# Altium PCB PCB1.PcbDoc
Units mm, origin at the board's own origin, x right, y up, seen from the top; angles counter-clockwise.
Board outline 97.28 x 101.47 mm, 2 copper layers (Top Layer, Bottom Layer); 96 components, 19 nets, 263 pads, 0 vias.
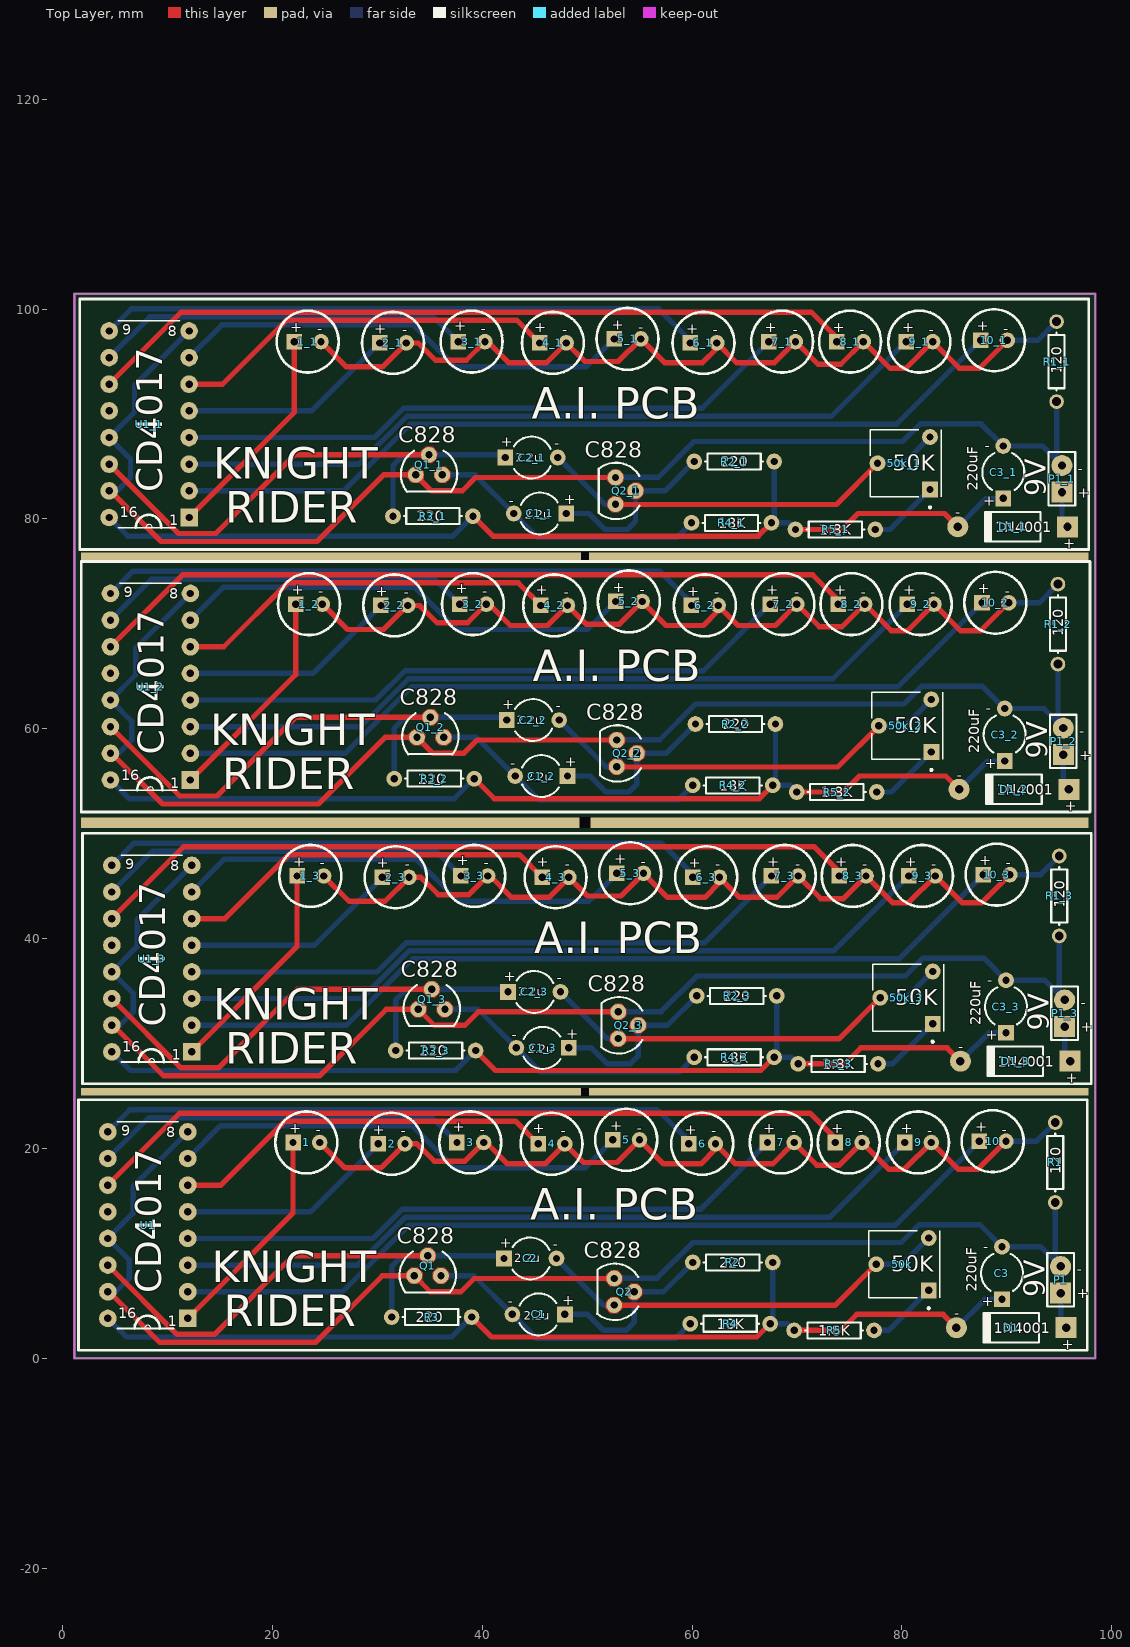
[diagram p0: Top Layer view]
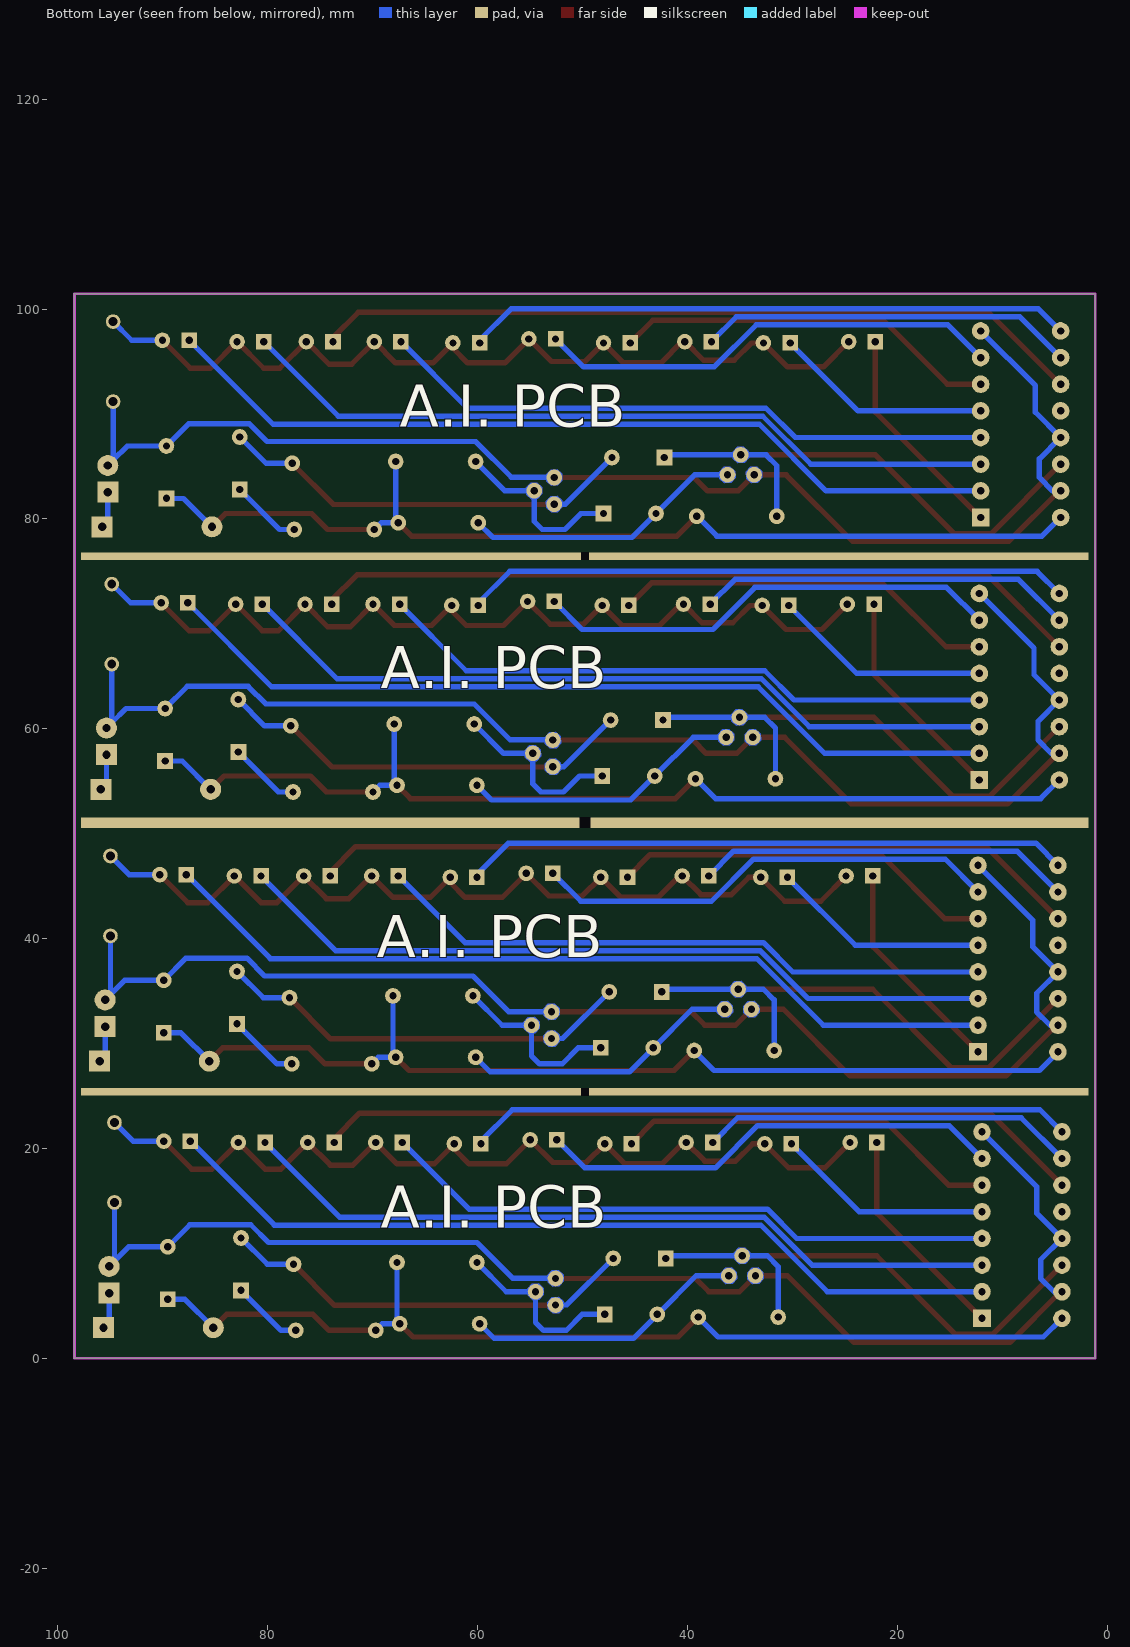
[diagram p1: Bottom Layer view, seen from below]

## Layer stack, top to bottom
Top Solder: solder mask 0.0102, Solder Resist, Dk 3.5
Top Layer: signal copper 0.0356
Dielectric 1: dielectric 0.32, FR-4, Dk 4.8
Bottom Layer: signal copper 0.0356
Bottom Solder: solder mask 0.0102, Solder Resist, Dk 3.5

## Board outline
1.143,0 1.143,101.473 98.425,101.473 98.425,0

## Design rules (kind name [scope] priority, off if disabled: settings)
Clearance [All] p1: gap=0.254 ignorepadtopadclearanceinfootprint=FALSE except(0: Arc-Hole Track-Hole SMDPad-Hole THPad-Hole Via-Hole Fill-Hole Poly-Hole Region-Hole Text-Hole)
PolygonConnect [All] p1: connectstyle=Relief reliefconductorwidth=0.254 reliefentries=4 polygonreliefangle="90 Angle" airgapwidth=0.254
RoutingVias [All] p1: holewidth=0.711 width=1.27 viastyle="Through Hole" minholewidth=0.711 minwidth=1.27 maxholewidth=0.711 maxwidth=1.27
SolderMaskExpansion [All] p1: expansion=0.102
Width [All] p1: maxlimit=0.508 minlimit=0.254 preferedwidth=0.508
30 further rules are at their usual default settings.

## Classes and differential pairs
component class Sheet1: 1 2 3 4 5 6 7 8 9 10 50k C1 C2 C3 D1 P1 Q1 Q2 Q? R1 R2 R3 R4 R5 U1

## Components (designator, comment, footprint, x,y, rotation, side; value= is the part's Value field where it differs from the comment)
1 "L-53GD" L-53GD 23.241,20.574 r0 top
1_1 "L-53GD" L-53GD 23.368,96.901 r0 top (schematic designator 1)
1_2 "L-53GD" L-53GD 23.495,71.882 r0 top (schematic designator 1)
1_3 "L-53GD" L-53GD 23.622,45.974 r0 top (schematic designator 1)
2 "L-53GD" L-53GD 31.369,20.447 r0 top
2_1 "L-53GD" L-53GD 31.496,96.774 r0 top (schematic designator 2)
2_2 "L-53GD" L-53GD 31.623,71.755 r0 top (schematic designator 2)
2_3 "L-53GD" L-53GD 31.75,45.847 r0 top (schematic designator 2)
3 "L-53GD" L-53GD 38.862,20.574 r0 top
3_1 "L-53GD" L-53GD 38.989,96.901 r0 top (schematic designator 3)
3_2 "L-53GD" L-53GD 39.116,71.882 r0 top (schematic designator 3)
3_3 "L-53GD" L-53GD 39.243,45.974 r0 top (schematic designator 3)
4 "L-53GD" L-53GD 46.609,20.447 r0 top
4_1 "L-53GD" L-53GD 46.736,96.774 r0 top (schematic designator 4)
4_2 "L-53GD" L-53GD 46.863,71.755 r0 top (schematic designator 4)
4_3 "L-53GD" L-53GD 46.99,45.847 r0 top (schematic designator 4)
5 "L-53GD" L-53GD 53.721,20.828 r0 top
5_1 "L-53GD" L-53GD 53.848,97.155 r0 top (schematic designator 5)
5_2 "L-53GD" L-53GD 53.975,72.136 r0 top (schematic designator 5)
5_3 "L-53GD" L-53GD 54.102,46.228 r0 top (schematic designator 5)
6 "L-53GD" L-53GD 60.96,20.447 r0 top
6_1 "L-53GD" L-53GD 61.087,96.774 r0 top (schematic designator 6)
6_2 "L-53GD" L-53GD 61.214,71.755 r0 top (schematic designator 6)
6_3 "L-53GD" L-53GD 61.341,45.847 r0 top (schematic designator 6)
7 "L-53GD" L-53GD 68.453,20.574 r0 top
7_1 "L-53GD" L-53GD 68.58,96.901 r0 top (schematic designator 7)
7_2 "L-53GD" L-53GD 68.707,71.882 r0 top (schematic designator 7)
7_3 "L-53GD" L-53GD 68.834,45.974 r0 top (schematic designator 7)
8 "L-53GD" L-53GD 74.93,20.574 r0 top
8_1 "L-53GD" L-53GD 75.057,96.901 r0 top (schematic designator 8)
8_2 "L-53GD" L-53GD 75.184,71.882 r0 top (schematic designator 8)
8_3 "L-53GD" L-53GD 75.311,45.974 r0 top (schematic designator 8)
9 "L-53GD" L-53GD 81.534,20.574 r0 top
9_1 "L-53GD" L-53GD 81.661,96.901 r0 top (schematic designator 9)
9_2 "L-53GD" L-53GD 81.788,71.882 r0 top (schematic designator 9)
9_3 "L-53GD" L-53GD 81.915,45.974 r0 top (schematic designator 9)
10 "L-53GD" L-53GD 88.646,20.701 r0 top
10_1 "L-53GD" L-53GD 88.773,97.028 r0 top (schematic designator 10)
10_2 "L-53GD" L-53GD 88.9,72.009 r0 top (schematic designator 10)
10_3 "L-53GD" L-53GD 89.027,46.101 r0 top (schematic designator 10)
50k "50K" *TRIM_EVN-D8AA03B14 80.05,8.977 r90 top
50k_1 "50K" *TRIM_EVN-D8AA03B14 80.177,85.304 r90 top (schematic designator 50k)
50k_2 "50K" *TRIM_EVN-D8AA03B14 80.304,60.285 r90 top (schematic designator 50k)
50k_3 "50K" *TRIM_EVN-D8AA03B14 80.431,34.377 r90 top (schematic designator 50k)
C1 "" CAPR5-4X5 45.379,4.191 r180 top value=2.2uF
C1_1 "" CAPR5-4X5 45.506,80.518 r180 top value=2.2uF (schematic designator C1)
C1_2 "" CAPR5-4X5 45.633,55.499 r180 top value=2.2uF (schematic designator C1)
C1_3 "" CAPR5-4X5 45.76,29.591 r180 top value=2.2uF (schematic designator C1)
C2 "" CAPR5-4X5 44.577,9.525 r0 top value=2.2uF
C2_1 "" CAPR5-4X5 44.704,85.852 r0 top value=2.2uF (schematic designator C2)
C2_2 "" CAPR5-4X5 44.831,60.833 r0 top value=2.2uF (schematic designator C2)
C2_3 "" CAPR5-4X5 44.958,34.925 r0 top value=2.2uF (schematic designator C2)
C3 "" CAPR5-4X5 89.535,8.128 r90 top value=100pF
C3_1 "" CAPR5-4X5 89.662,84.455 r90 top value=100pF (schematic designator C3)
C3_2 "" CAPR5-4X5 89.789,59.436 r90 top value=100pF (schematic designator C3)
C3_3 "" CAPR5-4X5 89.916,33.528 r90 top value=100pF (schematic designator C3)
D1 "" DO-41 90.424,2.921 r180 top
D1_1 "" DO-41 90.551,79.248 r180 top (schematic designator D1)
D1_2 "" DO-41 90.678,54.229 r180 top (schematic designator D1)
D1_3 "" DO-41 90.805,28.321 r180 top (schematic designator D1)
P1 "" HDR1X2 95.123,6.223 r90 top
P1_1 "" HDR1X2 95.25,82.55 r90 top (schematic designator P1)
P1_2 "" HDR1X2 95.377,57.531 r90 top (schematic designator P1)
P1_3 "" HDR1X2 95.504,31.623 r90 top (schematic designator P1)
Q1 "P2N2222A" *TO92 34.798,7.874 r0 top
Q1_1 "P2N2222A" *TO92 34.925,84.201 r0 top (schematic designator Q1)
Q1_2 "P2N2222A" *TO92 35.052,59.182 r0 top (schematic designator Q1)
Q1_3 "P2N2222A" *TO92 35.179,33.274 r0 top (schematic designator Q1)
Q2 "P2N2222A" *TO92 52.578,6.35 r270 top
Q2_1 "P2N2222A" *TO92 52.705,82.677 r270 top (schematic designator Q2)
Q2_2 "P2N2222A" *TO92 52.832,57.658 r270 top (schematic designator Q2)
Q2_3 "P2N2222A" *TO92 52.959,31.75 r270 top (schematic designator Q2)
R1 "" AXIAL-0.3#1 94.615,18.669 r270 top value=220
R1_1 "" AXIAL-0.3#1 94.742,94.996 r270 top value=220 (schematic designator R1)
R1_2 "" AXIAL-0.3#1 94.869,69.977 r270 top value=220 (schematic designator R1)
R1_3 "" AXIAL-0.3#1 94.996,44.069 r270 top value=220 (schematic designator R1)
R2 "" AXIAL-0.3#2 63.881,9.144 r0 top value=220
R2_1 "" AXIAL-0.3#2 64.008,85.471 r0 top value=220 (schematic designator R2)
R2_2 "" AXIAL-0.3#2 64.135,60.452 r0 top value=220 (schematic designator R2)
R2_3 "" AXIAL-0.3#2 64.262,34.544 r0 top value=220 (schematic designator R2)
R3 "" AXIAL-0.3#2 35.179,3.937 r180 top value=220
R3_1 "" AXIAL-0.3#2 35.306,80.264 r180 top value=220 (schematic designator R3)
R3_2 "" AXIAL-0.3#2 35.433,55.245 r180 top value=220 (schematic designator R3)
R3_3 "" AXIAL-0.3#2 35.56,29.337 r180 top value=220 (schematic designator R3)
R4 "" AXIAL-0.3#2 63.627,3.302 r0 top value=18K
R4_1 "" AXIAL-0.3#2 63.754,79.629 r0 top value=18K (schematic designator R4)
R4_2 "" AXIAL-0.3#2 63.881,54.61 r0 top value=18K (schematic designator R4)
R4_3 "" AXIAL-0.3#2 64.008,28.702 r0 top value=18K (schematic designator R4)
R5 "" AXIAL-0.3#2 73.533,2.667 r180 top value=1.8K
R5_1 "" AXIAL-0.3#2 73.66,78.994 r180 top value=1.8K (schematic designator R5)
R5_2 "" AXIAL-0.3#2 73.787,53.975 r180 top value=1.8K (schematic designator R5)
R5_3 "" AXIAL-0.3#2 73.914,28.067 r180 top value=1.8K (schematic designator R5)
U1 "CD4017BE" *DIP254P762X508-16 4.318,21.59 r180 top
U1_1 "CD4017BE" *DIP254P762X508-16 4.445,97.917 r180 top (schematic designator U1)
U1_2 "CD4017BE" *DIP254P762X508-16 4.572,72.898 r180 top (schematic designator U1)
U1_3 "CD4017BE" *DIP254P762X508-16 4.699,46.99 r180 top (schematic designator U1)

## Footprints (in the part's own frame and the unit in brackets; to place one, negate y for a bottom-side part, rotate by r counter-clockwise, add the part's x,y. Pads: shape width x height; smd on the part's side, far side on the other; paste and mask are expansions set on the pad)
*DIP254P762X508-16 [mil]
  rect 66x66 hole 27.56: 1(-300,700)
  round 66 hole 27.56: 2(-300,600) 3(-300,500) 4(-300,400) 5(-300,300) 6(-300,200) 7(-300,100) 8(-300,0) 9(0,0) 10(0,100) 11(0,200) 12(0,300) 13(0,400) 14(0,500) 15(0,600) 16(0,700)
  silkscreen extent -265,-38 -35,738
*TO92 [mm]
  round 1.5 hole 0.7: 1(1.27,0) 2(0,1.905) 3(-1.27,0)
  Top Layer region: -0.482,0.287 -0.916,0.76 -1.557,0.788 -2.03,0.354 -2.058,-0.287 -1.624,-0.76 -0.983,-0.788 -0.51,-0.354
  Top Layer region: 0.788,2.192 0.354,2.665 -0.287,2.693 -0.76,2.259 -0.788,1.618 -0.354,1.145 0.287,1.117 0.76,1.551
  Top Layer region: 2.058,0.287 1.624,0.76 0.983,0.788 0.51,0.354 0.482,-0.287 0.916,-0.76 1.557,-0.788 2.03,-0.354
  Bottom Layer region: -0.482,0.287 -0.916,0.76 -1.557,0.788 -2.03,0.354 -2.058,-0.287 -1.624,-0.76 -0.983,-0.788 -0.51,-0.354
  Bottom Layer region: 0.788,2.192 0.354,2.665 -0.287,2.693 -0.76,2.259 -0.788,1.618 -0.354,1.145 0.287,1.117 0.76,1.551
  Bottom Layer region: 2.058,0.287 1.624,0.76 0.983,0.788 0.51,0.354 0.482,-0.287 0.916,-0.76 1.557,-0.788 2.03,-0.354
  Multi-Layer region: -0.482,0.287 -0.916,0.76 -1.557,0.788 -2.03,0.354 -2.058,-0.287 -1.624,-0.76 -0.983,-0.788 -0.51,-0.354
  Multi-Layer region: 0.788,2.192 0.354,2.665 -0.287,2.693 -0.76,2.259 -0.788,1.618 -0.354,1.145 0.287,1.117 0.76,1.551
  Multi-Layer region: 2.058,0.287 1.624,0.76 0.983,0.788 0.51,0.354 0.482,-0.287 0.916,-0.76 1.557,-0.788 2.03,-0.354
  silkscreen extent -2.68,-1.61 2.7,2.3
*TRIM_EVN-D8AA03B14 [mm]
  rect 1.508x1.508 hole 0.7: 1(-2.5,-2.5)
  round 1.508 hole 0.7: 2(0,2.5) 3(2.5,-2.5)
  silkscreen extent -4.3,-3.57 3.2,3.2
AXIAL-0.3#1 [mm] "Axial Device, Thru-Hole; 2 Leads; 0.3 in Pin Spacing"
  round 1.4 hole 0.85: 1(-3.81,0) 2(3.81,0)
  silkscreen extent -2.77,-0.76 2.77,0.76
AXIAL-0.3#2 [mm] "Axial Device, Thru-Hole; 2 Leads; 0.3 in Pin Spacing"
  round 1.5 hole 0.7: 1(-3.81,0) 2(3.81,0)
  silkscreen extent -2.77,-0.76 2.77,0.76
CAPR5-4X5 [mm] "Capacitor; 2 Leads"
  rect 1.5x1.5 hole 0.7: 1(-2.5,0)
  round 1.5 hole 0.7: 2(2.5,0)
  silkscreen extent -1.69,-2 1.82,2
DO-41 [mm] "Diode, Axial; Body 5.2 x 2.7 mm (LxDia. max), Lead Dia. 0.86 mm (max)"
  rect 2x2 hole 0.8: 1(-5.23,0)
  round 2 hole 0.8: 2(5.23,0)
  silkscreen extent -2.65,-1.4 2.75,1.4
HDR1X2 [mm] "Connector; Header; 2 Position"
  rect 2x2 hole 0.8: 1(0,0)
  round 2 hole 0.8: 2(2.54,0)
  silkscreen extent -1.27,-1.27 3.81,1.27
L-53GD [mm]
  rect 1.48x1.48 hole 0.7: 1(-1.27,0)
  round 1.48 hole 0.7: 2(1.27,0)
  silkscreen extent -2.95,-2.95 2.95,2.95

## Part data
1 1_1 1_2 1_3 2 2_1 2_2 2_3 3 3_1 3_2 3_3 4 4_1 4_2 4_3 5 5_1 5_2 5_3 6 6_1 6_2 6_3 7 7_1 7_2 7_3 8 8_1 8_2 8_3 9 9_1 9_2 9_3 10 10_1 10_2 10_3: "LED", Manufacturer_Name=Kingbright, Mouser Part Number=N/A, RS Part Number=2286004A, Allied_Number=70424261, Allied Price/Stock=http://www.alliedelec.com/kingbright-l-53gd/70424261/, Datasheet Link=http://docs-emea.rs-online.com/webdocs/151e/0900766b8151e408.pdf, Manufacturer_Part_Number=L-53GD, Mouser Price/Stock=https://www.mouser.com/Search/Refine.aspx?Keyword=N%2FA, RS Price/Stock=http://uk.rs-online.com/web/p/products/2286004A
50k 50k_1 50k_2 50k_3: library part EVN-D8AA03B14, "Trimmer; Carbon; Rest 10 Kilohms; PCB; 1 Turn; Pwr-Rtg 0.1 W; Linear; Top Adj; 6 mm SQ", Package="PQFP-44 Panasonic", Availability=Unavailable, MF="Panasonic Electronic", MP=EVN-D8AA03B14, Price=None, SnapEDA_Link=https://www.snapeda.com/parts/EVN-D8AA03B14/Panasonic%20Electronic%20Components/view-part/?ref=snap
C1 C1_1 C1_2 C1_3 C2 C2_1 C2_2 C2_3 C3 C3_1 C3_2 C3_3: library part Cap2, "Capacitor", PackageDescription="Capacitor; 2 Leads", PackageReference=CAPR5-4X5, Published=23-Sep-2002, Publisher="Altium Limited"
D1 D1_1 D1_2 D1_3: library part "Diode 1N4001", "1 Amp General Purpose Rectifier", Code_JEDEC=DO-204-AL, ComponentLink1Description="Manufacturer Link", ComponentLink1URL=http://www.fairchildsemi.com/, ComponentLink2Description=Datasheet, ComponentLink2URL=http://www.fairchildsemi.com/ds/1N%2F1N4001.pdf, DatasheetVersion=1998, LatestRevisionDate=17-Jul-2002, LatestRevisionNote="Re-released for DXP Platform.", PackageDescription="Diode, Axial; Body 5.2 x 2.7 mm (LxDia. max), Lead Dia. 0.86 mm (max)", PackageReference=DO-41, PackageVersion=Aug-1999, Published=8-Jun-2000, Publisher="Altium Limited"
P1 P1_1 P1_2 P1_3: library part "Header 2", "Header, 2-Pin", LatestRevisionDate=17-Jul-2002, LatestRevisionNote="Re-released for DXP Platform.", Publisher="Altium Limited"
Q1 Q1_1 Q1_2 Q1_3 Q2 Q2_1 Q2_2 Q2_3: Package="TO-92 NXP Semiconductors", Availability=Unavailable, MF="ON Semiconductor", MP=P2N2222A, Price=None, SnapEDA_Link=https://www.snapeda.com/parts/P2N2222A/ON%20Semiconductor/view-part/?ref=snap
R1 R1_1 R1_2 R1_3 R2 R2_1 R2_2 R2_3 R3 R3_1 R3_2 R3_3 R4 R4_1 R4_2 R4_3 R5 R5_1 R5_2 R5_3: library part Res1, "Resistor", LatestRevisionDate=17-Jul-2002, LatestRevisionNote="Re-released for DXP Platform.", PackageDescription="Axial Device, Thru-Hole; 2 Leads; 0.3 in Pin Spacing", PackageReference=AXIAL-0.3, Published=8-Jun-2000, Publisher="Altium Limited"
U1 U1_1 U1_2 U1_3: "IC Mos 4017/CD4017BE HARRIS", Package="DIP-16 Intersil", Availability=Unavailable, MF=Texas, MP=CD4017BE, Price=None, SnapEDA_Link=https://www.snapeda.com/parts/CD4017BE/Texas%20Instruments/view-part/?ref=snap

## Free pads (board coordinates)
  rect 96x0.7 hole 0.7 square: 34(49.784,25.4) 34(49.784,76.454)
  rect 96x1 hole 1 square: 34(49.784,51.054)

## Nets (pads, with @x,y where several pads share a name; then routed paths per layer and width w, separated by ;. In a path a pad name is that pad's centre, name@x,y a point inside that pad or via, vN(x,y) a via of type N, cw(c..) or ccw(c..) an arc to the next point about the centre after c; other vN are vias at no path point)
Net1_1: 1.1 U1.1 | length 20.9
  Top Layer w0.508: U1.1 21.971,13.843 1.1
Net1_2: 1.2 2.2 3.2 4.2 5.2 6.2 7.2 8.2 9.2 10.2 R1.1 | length 87.2
  Top Layer w0.508: 1.2 26.924,18.161 30.353,18.161 2.2 33.782,20.447 35.433,18.796 38.354,18.796 3.2 40.386,20.574 42.418,18.542 45.974,18.542 4.2 49.657,18.669 52.832,18.669 5.2 57.277,18.542 60.833,18.542 62.23,19.939 6.2 64.135,18.542 67.691,18.542 7.2 71.882,18.415 74.041,18.415 8.2 78.74,18.034 80.264,18.034 9.2 85.344,18.034 87.249,18.034 10.2
  Bottom Layer w0.508: 10.2 92.837,20.701 R1.1
Net2_1: 2.1 U1.5 | length 20.8
  Bottom Layer w0.508: U1.5 23.622,13.97 2.1
Net3_1: 3.1 U1.10 | length 35.9
  Bottom Layer w0.508: U1.10 8.204,22.936 35.23,22.936 3.1
Net4_1: 4.1 U1.6 | length 36.8
  Top Layer w0.508: U1.6 15.113,16.51 21.209,22.606 43.18,22.606 4.1
Net5_1: 5.1 U1.7 | length 44.6
  Bottom Layer w0.508: U1.7 15.062,22.174 33.325,22.174 37.338,18.161 49.784,18.161 5.1
Net6_1: 6.1 U1.9 | length 57.7
  Bottom Layer w0.508: U1.9 6.426,23.698 56.693,23.698 59.69,20.701 6.1
Net7_1: 7.1 U1.4 | length 59
  Bottom Layer w0.508: U1.4 29.595,11.43 32.389,14.224 60.833,14.224 7.1
Net8_1: 8.1 U1.11 | length 73.6
  Top Layer w0.508: U1.11 11.176,23.368 71.247,23.368 73.66,20.955 8.1
Net9_1: 9.1 U1.3 | length 73.2
  Bottom Layer w0.508: U1.3 28.132,8.89 32.704,13.462 73.152,13.462 9.1
Net10_1: 10.1 U1.2 | length 81.4
  Bottom Layer w0.508: U1.2 26.67,6.35 33.02,12.7 79.375,12.7 10.1
Net50k_1: 50k.1 R5.1 | length 6.8
  Bottom Layer w0.508: R5.1 78.74,2.667 50k.1
Net50k_2: 50k.2 50k.3 C2.2 Q2.1 | length 40
  Top Layer w0.508: Q2.1 52.578,5.054 73.627,5.054 50k.2
  Bottom Layer w0.508: C2.2 51.522,5.08 Q2.1 ; 50k.2 80.05,8.977 50k.3
NetC1_1: C1.1 Q2.2 R2.1 | length 17.2
  Bottom Layer w0.508: C1.1 50.038,4.191 51.562,2.667 53.721,2.667 54.483,3.429 Q2.2 57.277,6.35 R2.1
NetC1_2: C1.2 Q1.1 R4.1 | length 26.8
  Bottom Layer w0.508: Q1.1 39.196,7.874 C1.2 45.165,1.905 58.42,1.905 R4.1
NetC2_1: C2.1 Q1.2 R3.2 U1.14 | length 52.4
  Top Layer w0.508: U1.14 10.922,2.286 14.478,2.286 21.971,9.779 Q1.2
  Bottom Layer w0.508: R3.2 31.369,8.763 32.385,9.779 Q1.2 41.823,9.779 C2.1
NetC3_1: C3.1 D1.2 R2.2 R3.1 R4.2 R5.2 U1.16 | length 96.5
  Top Layer w0.508: R3.1 40.894,2.032 66.167,2.032 R4.2 ; R5.2 74.168,2.667 75.692,4.191 83.924,4.191 D1.2
  Bottom Layer w0.508: U1.16 6.096,2.032 37.084,2.032 R3.1 ; R2.2 67.691,3.556 R4.2 69.088,3.302 R5.2 ; D1.2 87.901,5.628 C3.1
NetC3_2: C3.2 P1.2 Q1.3 Q2.3 R1.2 U1.8 U1.13 U1.15 | length 126.5
  Top Layer w0.508: U1.15 4.445,6.35 9.271,1.524 24.13,1.524 30.48,7.874 Q1.3 35.052,6.35 37.973,6.35 39.243,7.62 Q2.3
  Bottom Layer w0.508: U1.15 5.08,6.35 6.35,7.62 6.35,9.398 U1.13 6.731,13.843 6.731,16.383 U1.8 ; Q2.3 52.578,7.646 56.668,7.646 60.071,11.049 79.932,11.049 81.622,12.739 87.424,12.739 C3.2 93.258,10.628 P1.2@94.615,9.271 ; R1.2 P1.2@94.615,9.271 ; P1.2 P1.2@94.615,9.271
NetD1_1: D1.1 P1.1 | length 3.5
  Bottom Layer w0.508: P1.1 95.123,3.452 D1.1
pads on no net: 1_1.1 1_1.2 1_2.1 1_2.2 1_3.1 1_3.2 2_1.1 2_1.2 2_2.1 2_2.2 2_3.1 2_3.2 3_1.1 3_1.2 3_2.1 3_2.2 3_3.1 3_3.2 4_1.1 4_1.2 4_2.1 4_2.2 4_3.1 4_3.2 5_1.1 5_1.2 5_2.1 5_2.2 5_3.1 5_3.2 6_1.1 6_1.2 6_2.1 6_2.2 6_3.1 6_3.2 7_1.1 7_1.2 7_2.1 7_2.2 7_3.1 7_3.2 8_1.1 8_1.2 8_2.1 8_2.2 8_3.1 8_3.2 9_1.1 9_1.2 9_2.1 9_2.2 9_3.1 9_3.2 10_1.1 10_1.2 10_2.1 10_2.2 10_3.1 10_3.2 50k_1.1 50k_1.2 50k_1.3 50k_2.1 50k_2.2 50k_2.3 50k_3.1 50k_3.2 50k_3.3 C1_1.1 C1_1.2 C1_2.1 C1_2.2 C1_3.1 C1_3.2 C2_1.1 C2_1.2 C2_2.1 C2_2.2 C2_3.1 C2_3.2 C3_1.1 C3_1.2 C3_2.1 C3_2.2 C3_3.1 C3_3.2 D1_1.1 D1_1.2 D1_2.1 D1_2.2 D1_3.1 D1_3.2 P1_1.1 P1_1.2 P1_2.1 P1_2.2 P1_3.1 P1_3.2 Q1_1.1 Q1_1.2 Q1_1.3 Q1_2.1 Q1_2.2 Q1_2.3 Q1_3.1 Q1_3.2 Q1_3.3 Q2_1.1 Q2_1.2 Q2_1.3 Q2_2.1 Q2_2.2 Q2_2.3 Q2_3.1 Q2_3.2 Q2_3.3 R1_1.1 R1_1.2 R1_2.1 R1_2.2 R1_3.1 R1_3.2 R2_1.1 R2_1.2 R2_2.1 R2_2.2 R2_3.1 R2_3.2 R3_1.1 R3_1.2 R3_2.1 R3_2.2 R3_3.1 R3_3.2 R4_1.1 R4_1.2 R4_2.1 R4_2.2 R4_3.1 R4_3.2 R5_1.1 R5_1.2 R5_2.1 R5_2.2 R5_3.1 R5_3.2 U1.12 U1_1.1 U1_1.2 U1_1.3 U1_1.4 U1_1.5 U1_1.6 U1_1.7 U1_1.8 U1_1.9 U1_1.10 U1_1.11 U1_1.12 U1_1.13 U1_1.14 U1_1.15 U1_1.16 U1_2.1 U1_2.2 U1_2.3 U1_2.4 U1_2.5 U1_2.6 U1_2.7 U1_2.8 U1_2.9 U1_2.10 U1_2.11 U1_2.12 U1_2.13 U1_2.14 U1_2.15 U1_2.16 U1_3.1 U1_3.2 U1_3.3 U1_3.4 U1_3.5 U1_3.6 U1_3.7 U1_3.8 U1_3.9 U1_3.10 U1_3.11 U1_3.12 U1_3.13 U1_3.14 U1_3.15 U1_3.16
copper on no net: | length 2882.5
  Top Layer w0.508: 4.445,82.677 4.572,82.677 9.398,77.851 24.257,77.851 30.607,84.201 33.655,84.201 35.179,82.677 38.1,82.677 39.37,83.947 52.705,83.947 ; 4.445,85.217 11.049,78.613 14.605,78.613 22.098,86.106 34.925,86.106 ; 4.445,92.837 11.303,99.695 71.374,99.695 73.787,97.282 73.787,96.901 ; 4.572,57.658 4.699,57.658 9.525,52.832 24.384,52.832 30.734,59.182 33.782,59.182 35.306,57.658 38.227,57.658 39.497,58.928 52.832,58.928 ; 4.572,60.198 11.176,53.594 14.732,53.594 22.225,61.087 35.052,61.087 ; 4.572,67.818 11.43,74.676 71.501,74.676 73.914,72.263 73.914,71.882 ; 4.699,31.75 4.826,31.75 9.652,26.924 24.511,26.924 30.861,33.274 33.909,33.274 35.433,31.75 38.354,31.75 39.624,33.02 52.959,33.02 ; 4.699,34.29 11.303,27.686 14.859,27.686 22.352,35.179 35.179,35.179 ; 4.699,41.91 11.557,48.768 71.628,48.768 74.041,46.355 74.041,45.974 ; 12.065,80.137 22.098,90.17 22.098,96.901 ; 12.065,92.837 15.24,92.837 21.336,98.933 43.307,98.933 45.466,96.774 ; 12.192,55.118 22.225,65.151 22.225,71.882 ; 12.192,67.818 15.367,67.818 21.463,73.914 43.434,73.914 45.593,71.755 ; 12.319,29.21 22.352,39.243 22.352,45.974 ; 12.319,41.91 15.494,41.91 21.59,48.006 43.561,48.006 45.72,45.847 ; 24.638,96.901 27.051,94.488 30.48,94.488 32.766,96.774 33.909,96.774 35.56,95.123 38.481,95.123 40.259,96.901 40.513,96.901 42.545,94.869 46.101,94.869 48.006,96.774 49.784,94.996 52.959,94.996 55.118,97.155 57.404,94.869 60.96,94.869 62.357,96.266 62.357,96.774 64.262,94.869 67.818,94.869 69.85,96.901 72.009,94.742 74.168,94.742 76.327,96.901 78.867,94.361 80.391,94.361 82.931,96.901 85.471,94.361 87.376,94.361 90.043,97.028 ; 24.765,71.882 27.178,69.469 30.607,69.469 32.893,71.755 34.036,71.755 35.687,70.104 38.608,70.104 40.386,71.882 40.64,71.882 42.672,69.85 46.228,69.85 48.133,71.755 49.911,69.977 53.086,69.977 55.245,72.136 57.531,69.85 61.087,69.85 62.484,71.247 62.484,71.755 64.389,69.85 67.945,69.85 69.977,71.882 72.136,69.723 74.295,69.723 76.454,71.882 78.994,69.342 80.518,69.342 83.058,71.882 85.598,69.342 87.503,69.342 90.17,72.009 ; 24.892,45.974 27.305,43.561 30.734,43.561 33.02,45.847 34.163,45.847 35.814,44.196 38.735,44.196 40.513,45.974 40.767,45.974 42.799,43.942 46.355,43.942 48.26,45.847 50.038,44.069 53.213,44.069 55.372,46.228 57.658,43.942 61.214,43.942 62.611,45.339 62.611,45.847 64.516,43.942 68.072,43.942 70.104,45.974 72.263,43.815 74.422,43.815 76.581,45.974 79.121,43.434 80.645,43.434 83.185,45.974 85.725,43.434 87.63,43.434 90.297,46.101 ; 39.116,80.264 41.021,78.359 66.294,78.359 67.564,79.629 ; 39.243,55.245 41.148,53.34 66.421,53.34 67.691,54.61 ; 39.37,29.337 41.275,27.432 66.548,27.432 67.818,28.702 ; 52.705,81.407 52.705,81.381 73.754,81.381 77.677,85.304 ; 52.832,56.388 52.832,56.362 73.881,56.362 77.804,60.285 ; 52.959,30.48 52.959,30.454 74.008,30.454 77.931,34.377 ; 69.85,78.994 74.295,78.994 75.819,80.518 84.051,80.518 85.321,79.248 ; 69.977,53.975 74.422,53.975 75.946,55.499 84.178,55.499 85.448,54.229 ; 70.104,28.067 74.549,28.067 76.073,29.591 84.305,29.591 85.575,28.321
  Bottom Layer w0.508: 4.445,80.137 6.223,78.359 37.211,78.359 39.116,80.264 ; 4.445,82.677 5.207,82.677 6.477,83.947 6.477,85.725 4.445,87.757 6.858,90.17 6.858,92.71 12.065,97.917 ; 4.445,95.377 8.331,99.263 35.357,99.263 37.719,96.901 ; 4.445,97.917 6.553,100.025 56.82,100.025 59.817,97.028 59.817,96.774 ; 4.572,55.118 6.35,53.34 37.338,53.34 39.243,55.245 ; 4.572,57.658 5.334,57.658 6.604,58.928 6.604,60.706 4.572,62.738 6.985,65.151 6.985,67.691 12.192,72.898 ; 4.572,70.358 8.458,74.244 35.484,74.244 37.846,71.882 ; 4.572,72.898 6.68,75.006 56.947,75.006 59.944,72.009 59.944,71.755 ; 4.699,29.21 6.477,27.432 37.465,27.432 39.37,29.337 ; 4.699,31.75 5.461,31.75 6.731,33.02 6.731,34.798 4.699,36.83 7.112,39.243 7.112,41.783 12.319,46.99 ; 4.699,44.45 8.585,48.336 35.611,48.336 37.973,45.974 ; 4.699,46.99 6.807,49.098 57.074,49.098 60.071,46.101 60.071,45.847 ; 12.065,82.677 26.797,82.677 33.147,89.027 79.502,89.027 87.503,97.028 ; 12.065,85.217 28.259,85.217 32.831,89.789 73.279,89.789 80.391,96.901 ; 12.065,87.757 29.722,87.757 32.516,90.551 60.96,90.551 67.31,96.901 ; 12.065,90.297 23.749,90.297 30.226,96.774 ; 12.065,95.377 15.189,98.501 33.452,98.501 37.465,94.488 49.911,94.488 52.578,97.155 ; 12.192,57.658 26.924,57.658 33.274,64.008 79.629,64.008 87.63,72.009 ; 12.192,60.198 28.386,60.198 32.958,64.77 73.406,64.77 80.518,71.882 ; 12.192,62.738 29.849,62.738 32.643,65.532 61.087,65.532 67.437,71.882 ; 12.192,65.278 23.876,65.278 30.353,71.755 ; 12.192,70.358 15.316,73.482 33.579,73.482 37.592,69.469 50.038,69.469 52.705,72.136 ; 12.319,31.75 27.051,31.75 33.401,38.1 79.756,38.1 87.757,46.101 ; 12.319,34.29 28.513,34.29 33.085,38.862 73.533,38.862 80.645,45.974 ; 12.319,36.83 29.976,36.83 32.77,39.624 61.214,39.624 67.564,45.974 ; 12.319,39.37 24.003,39.37 30.48,45.847 ; 12.319,44.45 15.443,47.574 33.706,47.574 37.719,43.561 50.165,43.561 52.832,46.228 ; 31.496,80.264 31.496,85.09 32.512,86.106 34.925,86.106 41.95,86.106 42.204,85.852 ; 31.623,55.245 31.623,60.071 32.639,61.087 35.052,61.087 42.077,61.087 42.331,60.833 ; 31.75,29.337 31.75,34.163 32.766,35.179 35.179,35.179 42.204,35.179 42.458,34.925 ; 36.195,84.201 39.323,84.201 43.006,80.518 45.292,78.232 58.547,78.232 59.944,79.629 ; 36.322,59.182 39.45,59.182 43.133,55.499 45.419,53.213 58.674,53.213 60.071,54.61 ; 36.449,33.274 39.577,33.274 43.26,29.591 45.546,27.305 58.801,27.305 60.198,28.702 ; 47.204,85.852 51.649,81.407 52.705,81.407 ; 47.331,60.833 51.776,56.388 52.832,56.388 ; 47.458,34.925 51.903,30.48 52.959,30.48 ; 48.006,80.518 50.165,80.518 51.689,78.994 53.848,78.994 54.61,79.756 54.61,82.677 57.404,82.677 60.198,85.471 ; 48.133,55.499 50.292,55.499 51.816,53.975 53.975,53.975 54.737,54.737 54.737,57.658 57.531,57.658 60.325,60.452 ; 48.26,29.591 50.419,29.591 51.943,28.067 54.102,28.067 54.864,28.829 54.864,31.75 57.658,31.75 60.452,34.544 ; 52.705,83.947 52.705,83.973 56.795,83.973 60.198,87.376 80.059,87.376 81.749,89.066 87.551,89.066 89.662,86.955 93.385,86.955 94.742,85.598 ; 52.832,58.928 52.832,58.954 56.922,58.954 60.325,62.357 80.186,62.357 81.876,64.047 87.678,64.047 89.789,61.936 93.512,61.936 94.869,60.579 ; 52.959,33.02 52.959,33.046 57.049,33.046 60.452,36.449 80.313,36.449 82.003,38.139 87.805,38.139 89.916,36.028 93.639,36.028 94.996,34.671 ; 67.818,85.471 67.818,79.883 67.564,79.629 69.215,79.629 69.85,78.994 ; 67.945,60.452 67.945,54.864 67.691,54.61 69.342,54.61 69.977,53.975 ; 68.072,34.544 68.072,28.956 67.818,28.702 69.469,28.702 70.104,28.067 ; 77.47,78.994 78.867,78.994 82.677,82.804 ; 77.597,53.975 78.994,53.975 82.804,57.785 ; 77.677,85.304 80.177,85.304 82.677,87.804 ; 77.724,28.067 79.121,28.067 82.931,31.877 ; 77.804,60.285 80.304,60.285 82.804,62.785 ; 77.931,34.377 80.431,34.377 82.931,36.877 ; 85.321,79.248 88.028,81.955 89.662,81.955 ; 85.448,54.229 88.155,56.936 89.789,56.936 ; 85.575,28.321 88.282,31.028 89.916,31.028 ; 90.043,97.028 92.964,97.028 94.742,98.806 ; 90.17,72.009 93.091,72.009 94.869,73.787 ; 90.297,46.101 93.218,46.101 94.996,47.879 ; 94.742,91.186 94.742,85.598 ; 94.869,66.167 94.869,60.579 ; 94.996,40.259 94.996,34.671 ; 95.25,82.55 95.25,79.779 95.781,79.248 ; 95.25,85.09 94.742,85.598 ; 95.377,57.531 95.377,54.76 95.908,54.229 ; 95.377,60.071 94.869,60.579 ; 95.504,31.623 95.504,28.852 96.035,28.321 ; 95.504,34.163 94.996,34.671

## Keep-outs
Keep-Out Layer:
  the board outline again, w0.254

## Silkscreen, mask and mechanical layers (free items; w line width, h text height)
Top Overlay:
  lines w0.254: 6.858,2.845 cw(c8.103,2.819) 8.128,4.064 cw(c8.09,2.883) 9.271,2.845 ; 6.985,79.172 cw(c8.23,79.146) 8.255,80.391 cw(c8.217,79.21) 9.398,79.172 ; 7.112,54.153 cw(c8.357,54.127) 8.382,55.372 cw(c8.344,54.191) 9.525,54.153 ; 7.239,28.245 cw(c8.484,28.219) 8.509,29.464 cw(c8.471,28.283) 9.652,28.245 ; 1.524,0.762 97.663,0.762 97.663,24.638 1.524,24.638 1.524,0.762 ; 1.651,77.089 1.651,100.965 97.79,100.965 97.79,77.089 1.651,77.089 ; 1.778,52.07 1.778,75.946 97.917,75.946 97.917,52.07 1.778,52.07 ; 1.905,26.162 1.905,50.038 98.044,50.038 98.044,26.162 1.905,26.162
  text "+" at 52.324,98.044 h1
  text "+" at 37.338,97.917 h1
  text "+" at 87.122,97.917 h1
  text "+" at 21.717,97.79 h1
  text "+" at 44.958,97.79 h1
  text "-" at 54.864,97.79 h1
  text "+" at 66.929,97.79 h1
  text "+" at 73.406,97.79 h1
  text "+" at 80.01,97.79 h1
  text "-" at 24.257,97.663 h1
  text "+" at 29.718,97.663 h1
  text "-" at 39.878,97.663 h1
  text "+" at 59.436,97.663 h1
  text "-" at 89.662,97.663 h1
  text "9" at 5.715,97.536 h1
  text "-" at 32.385,97.536 h1
  text "-" at 47.625,97.536 h1
  text "-" at 61.976,97.536 h1
  text "-" at 69.596,97.536 h1
  text "-" at 75.946,97.536 h1
  text "-" at 82.55,97.536 h1
  text "8" at 10.033,97.409 h1
  text "120" at 95.25,93.853 h1 r90
  text "A.I. PCB" at 44.704,89.535 h3
  text "C828" at 32.004,87.249 h1.52
  text "+" at 41.783,86.868 h1
  text "-" at 46.863,86.741 h1
  text "-" at 87.884,86.487 h1
  text "C828" at 49.784,85.852 h1.52
  text "2.2u" at 43.18,85.471 h0.8
  text "220" at 62.738,84.963 h1
  text "50K" at 79.121,84.582 h1.52
  text "-" at 96.774,84.328 h1
  text "KNIGHT" at 14.351,83.82 h3
  text "220uF" at 87.249,82.677 h1 r90
  text "CD4017" at 9.525,82.55 h2.5 r90
  text "9V" at 93.726,82.169 h2 r90
  text "+" at 96.774,82.042 h1
  text "+" at 47.754,81.38 h1
  text "-" at 42.545,81.28 h1
  text "+" at 87.757,81.28 h1
  text "16" at 5.461,80.137 h1
  text "-" at 85.09,80.137 h1
  text "2.2u" at 44.069,80.01 h0.8
  text "220" at 33.782,79.756 h1
  text "RIDER" at 15.494,79.629 h3
  text "1" at 10.16,79.375 h1
  text "18K" at 62.484,79.121 h1
  text "1N4001" at 88.9,78.74 h1
  text "1.8K" at 72.136,78.486 h1
  text "+" at 95.377,77.216 h1
  text "+" at 52.451,73.025 h1
  text "+" at 37.465,72.898 h1
  text "+" at 87.249,72.898 h1
  text "+" at 21.844,72.771 h1
  text "+" at 45.085,72.771 h1
  text "-" at 54.991,72.771 h1
  text "+" at 67.056,72.771 h1
  text "+" at 73.533,72.771 h1
  text "+" at 80.137,72.771 h1
  text "-" at 24.384,72.644 h1
  text "+" at 29.845,72.644 h1
  text "-" at 40.005,72.644 h1
  text "+" at 59.563,72.644 h1
  text "-" at 89.789,72.644 h1
  text "9" at 5.842,72.517 h1
  text "-" at 32.512,72.517 h1
  text "-" at 47.752,72.517 h1
  text "-" at 62.103,72.517 h1
  text "-" at 69.723,72.517 h1
  text "-" at 76.073,72.517 h1
  text "-" at 82.677,72.517 h1
  text "8" at 10.16,72.39 h1
  text "120" at 95.377,68.834 h1 r90
  text "A.I. PCB" at 44.831,64.516 h3
  text "C828" at 32.131,62.23 h1.52
  text "+" at 41.91,61.849 h1
  text "-" at 46.99,61.722 h1
  text "-" at 88.011,61.468 h1
  text "C828" at 49.911,60.833 h1.52
  text "2.2u" at 43.307,60.452 h0.8
  text "220" at 62.865,59.944 h1
  text "50K" at 79.248,59.563 h1.52
  text "-" at 96.901,59.309 h1
  text "KNIGHT" at 14.097,58.42 h3
  text "220uF" at 87.376,57.658 h1 r90
  text "CD4017" at 9.652,57.531 h2.5 r90
  text "9V" at 93.853,57.15 h2 r90
  text "+" at 96.901,57.023 h1
  text "+" at 47.881,56.361 h1
  text "-" at 42.672,56.261 h1
  text "+" at 87.884,56.261 h1
  text "16" at 5.588,55.118 h1
  text "-" at 85.217,55.118 h1
  text "2.2u" at 44.196,54.991 h0.8
  text "220" at 33.909,54.737 h1
  text "1" at 10.287,54.356 h1
  text "RIDER" at 15.24,54.229 h3
  text "18K" at 62.611,54.102 h1
  text "1N4001" at 89.027,53.721 h1
  text "1.8K" at 72.263,53.467 h1
  text "+" at 95.504,52.197 h1
  text "+" at 52.578,47.117 h1
  text "+" at 37.592,46.99 h1
  text "+" at 87.376,46.99 h1
  text "+" at 21.971,46.863 h1
  text "+" at 45.212,46.863 h1
  text "-" at 55.118,46.863 h1
  text "+" at 67.183,46.863 h1
  text "+" at 73.66,46.863 h1
  text "+" at 80.264,46.863 h1
  text "-" at 24.511,46.736 h1
  text "+" at 29.972,46.736 h1
  text "-" at 40.132,46.736 h1
  text "+" at 59.69,46.736 h1
  text "-" at 89.916,46.736 h1
  text "9" at 5.969,46.609 h1
  text "-" at 32.639,46.609 h1
  text "-" at 47.879,46.609 h1
  text "-" at 62.23,46.609 h1
  text "-" at 69.85,46.609 h1
  text "-" at 76.2,46.609 h1
  text "-" at 82.804,46.609 h1
  text "8" at 10.287,46.482 h1
  text "120" at 95.504,42.926 h1 r90
  text "A.I. PCB" at 44.958,38.608 h3
  text "C828" at 32.258,36.322 h1.52
  text "+" at 42.037,35.941 h1
  text "-" at 47.117,35.814 h1
  text "-" at 88.138,35.56 h1
  text "C828" at 50.038,34.925 h1.52
  text "2.2u" at 43.434,34.544 h0.8
  text "220" at 62.992,34.036 h1
  text "50K" at 79.375,33.655 h1.52
  text "-" at 97.028,33.401 h1
  text "KNIGHT" at 14.351,32.258 h3
  text "220uF" at 87.503,31.75 h1 r90
  text "CD4017" at 9.779,31.623 h2.5 r90
  text "9V" at 93.98,31.242 h2 r90
  text "+" at 97.028,31.115 h1
  text "+" at 48.008,30.453 h1
  text "-" at 42.799,30.353 h1
  text "+" at 88.011,30.353 h1
  text "16" at 5.715,29.21 h1
  text "-" at 85.344,29.21 h1
  text "2.2u" at 44.323,29.083 h0.8
  text "220" at 34.036,28.829 h1
  text "1" at 10.414,28.448 h1
  text "18K" at 62.738,28.194 h1
  text "RIDER" at 15.494,28.067 h3
  text "1N4001" at 89.154,27.813 h1
  text "1.8K" at 72.39,27.559 h1
  text "+" at 95.631,26.289 h1
  text "+" at 52.197,21.717 h1
  text "+" at 37.211,21.59 h1
  text "+" at 86.995,21.59 h1
  text "+" at 21.59,21.463 h1
  text "+" at 44.831,21.463 h1
  text "-" at 54.737,21.463 h1
  text "+" at 66.802,21.463 h1
  text "+" at 73.279,21.463 h1
  text "+" at 79.883,21.463 h1
  text "-" at 24.13,21.336 h1
  text "+" at 29.591,21.336 h1
  text "-" at 39.751,21.336 h1
  text "+" at 59.309,21.336 h1
  text "-" at 89.535,21.336 h1
  text "9" at 5.588,21.209 h1
  text "-" at 32.258,21.209 h1
  text "-" at 47.498,21.209 h1
  text "-" at 61.849,21.209 h1
  text "-" at 69.469,21.209 h1
  text "-" at 75.819,21.209 h1
  text "-" at 82.423,21.209 h1
  text "8" at 9.906,21.082 h1
  text "120" at 95.123,17.526 h1 r90
  text "A.I. PCB" at 44.577,13.208 h3
  text "C828" at 31.877,10.922 h1.52
  text "+" at 41.656,10.541 h1
  text "-" at 46.736,10.414 h1
  text "-" at 87.757,10.16 h1
  text "C828" at 49.657,9.525 h1.52
  text "2.2u" at 43.053,9.144 h0.8
  text "220" at 62.611,8.636 h1
  text "50K" at 78.994,8.255 h1.52
  text "-" at 96.647,8.001 h1
  text "KNIGHT" at 14.224,7.239 h3
  text "220uF" at 87.122,6.35 h1 r90
  text "CD4017" at 9.398,6.223 h2.5 r90
  text "9V" at 93.599,5.842 h2 r90
  text "+" at 96.647,5.715 h1
  text "+" at 47.627,5.053 h1
  text "-" at 42.418,4.953 h1
  text "+" at 87.63,4.953 h1
  text "16" at 5.334,3.81 h1
  text "-" at 84.963,3.81 h1
  text "2.2u" at 43.942,3.683 h0.8
  text "220" at 33.655,3.429 h1
  text "1" at 10.033,3.048 h1
  text "RIDER" at 15.367,3.048 h3
  text "18K" at 62.357,2.794 h1
  text "1N4001" at 88.773,2.413 h1
  text "1.8K" at 72.009,2.159 h1
  text "+" at 95.25,0.889 h1
Bottom Overlay:
  text "A.I. PCB" at 67.437,88.773 h4
  text "A.I. PCB" at 69.215,63.881 h4
  text "A.I. PCB" at 69.596,38.227 h4
  text "A.I. PCB" at 69.215,12.446 h4